# Altium PCB PDB_Layout_2oz_v1.8.PcbDoc
Units mm, origin at the board's own origin, x right, y up, seen from the top; angles counter-clockwise.
Board outline 50 x 36 mm, 4 copper layers (Top Layer, GND_L2, PWR_L3, Bottom Layer), stack 1.922 mm thick; 33 components, 10 nets, 74 pads, 109 vias.
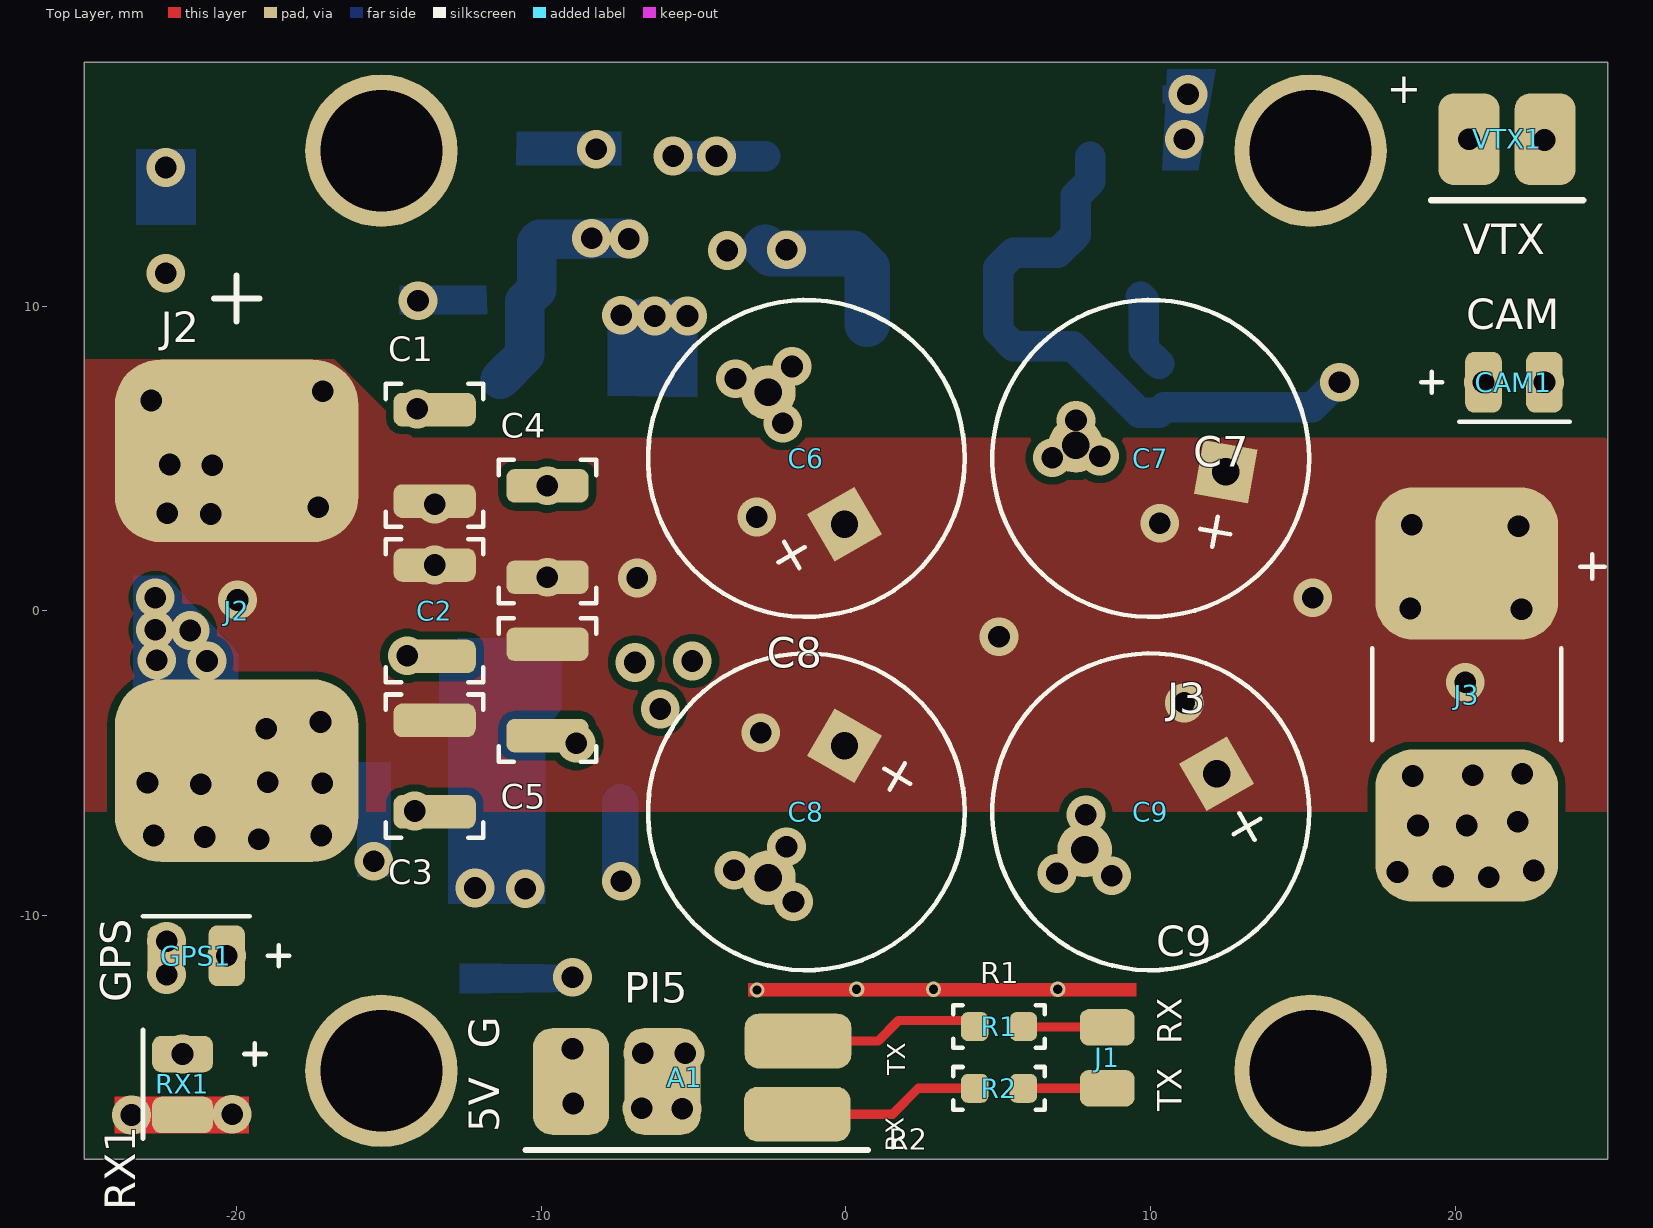
[diagram p0: Top Layer view]
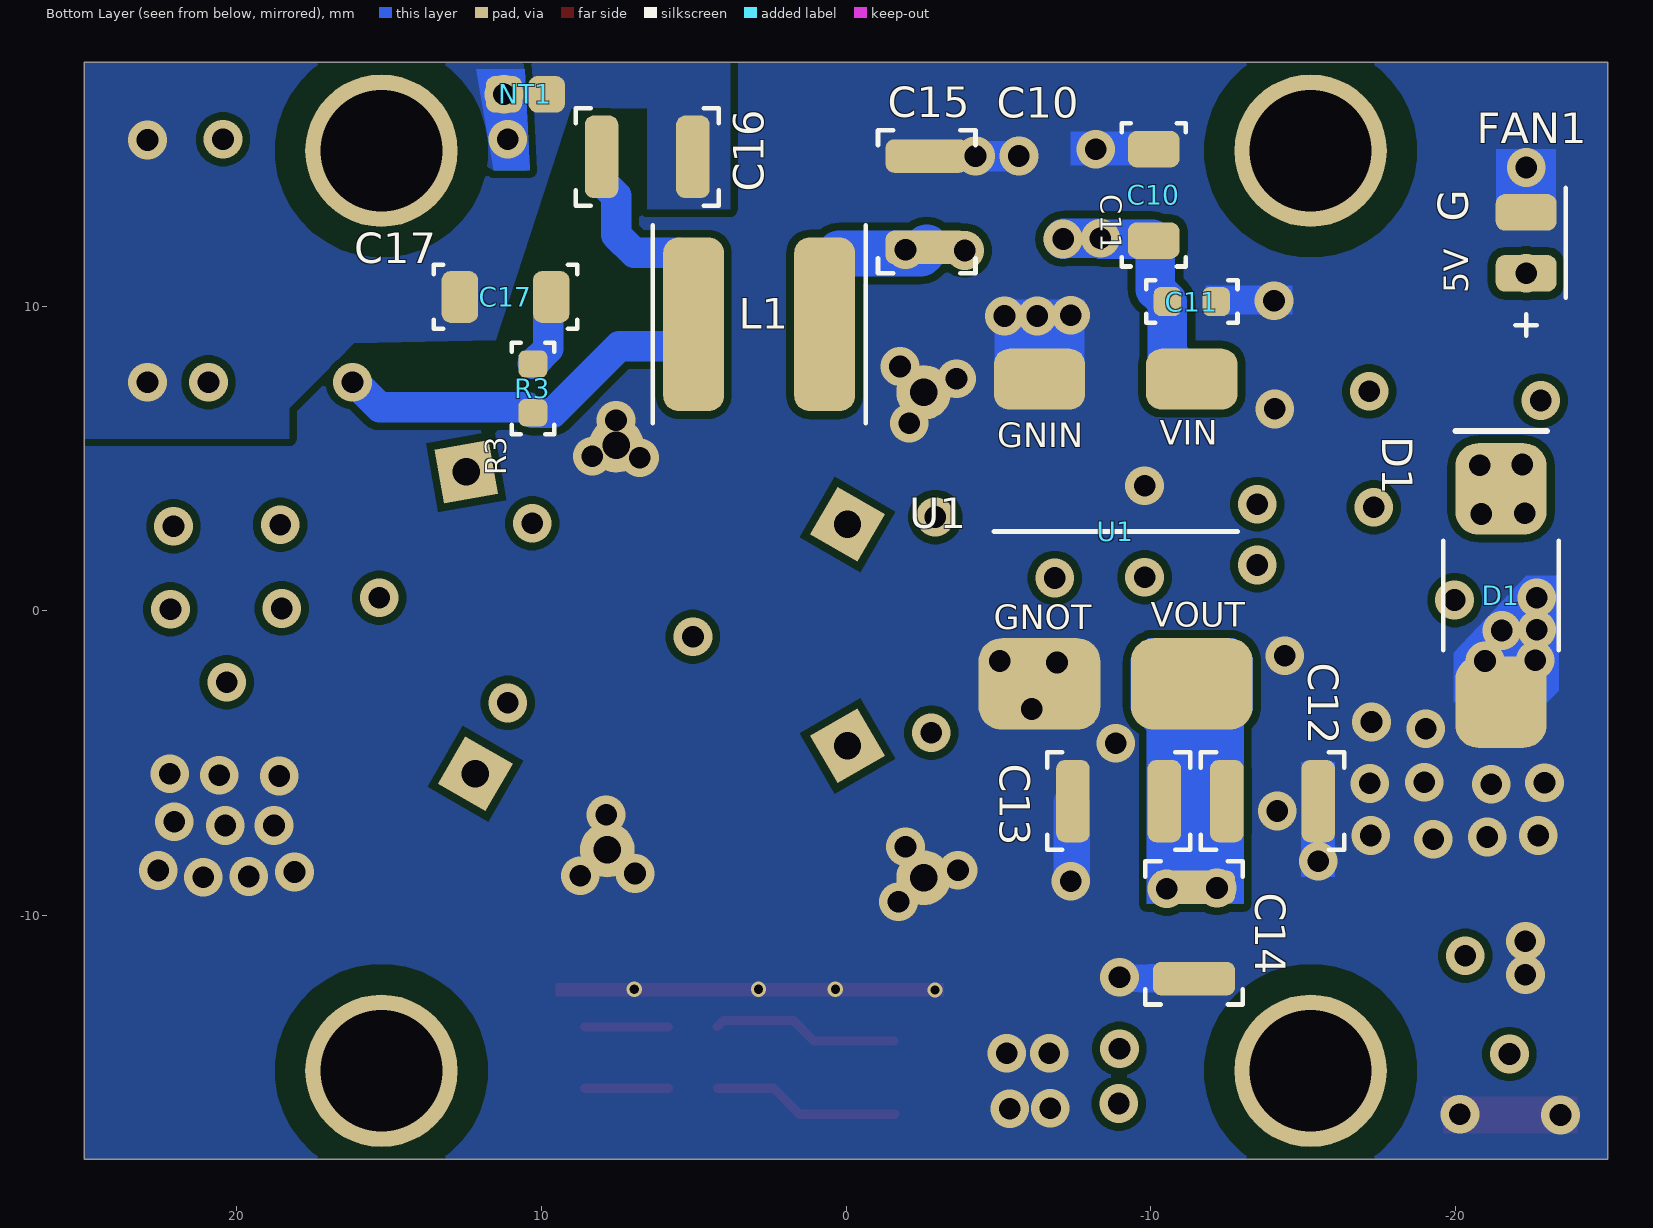
[diagram p1: Bottom Layer view, seen from below]
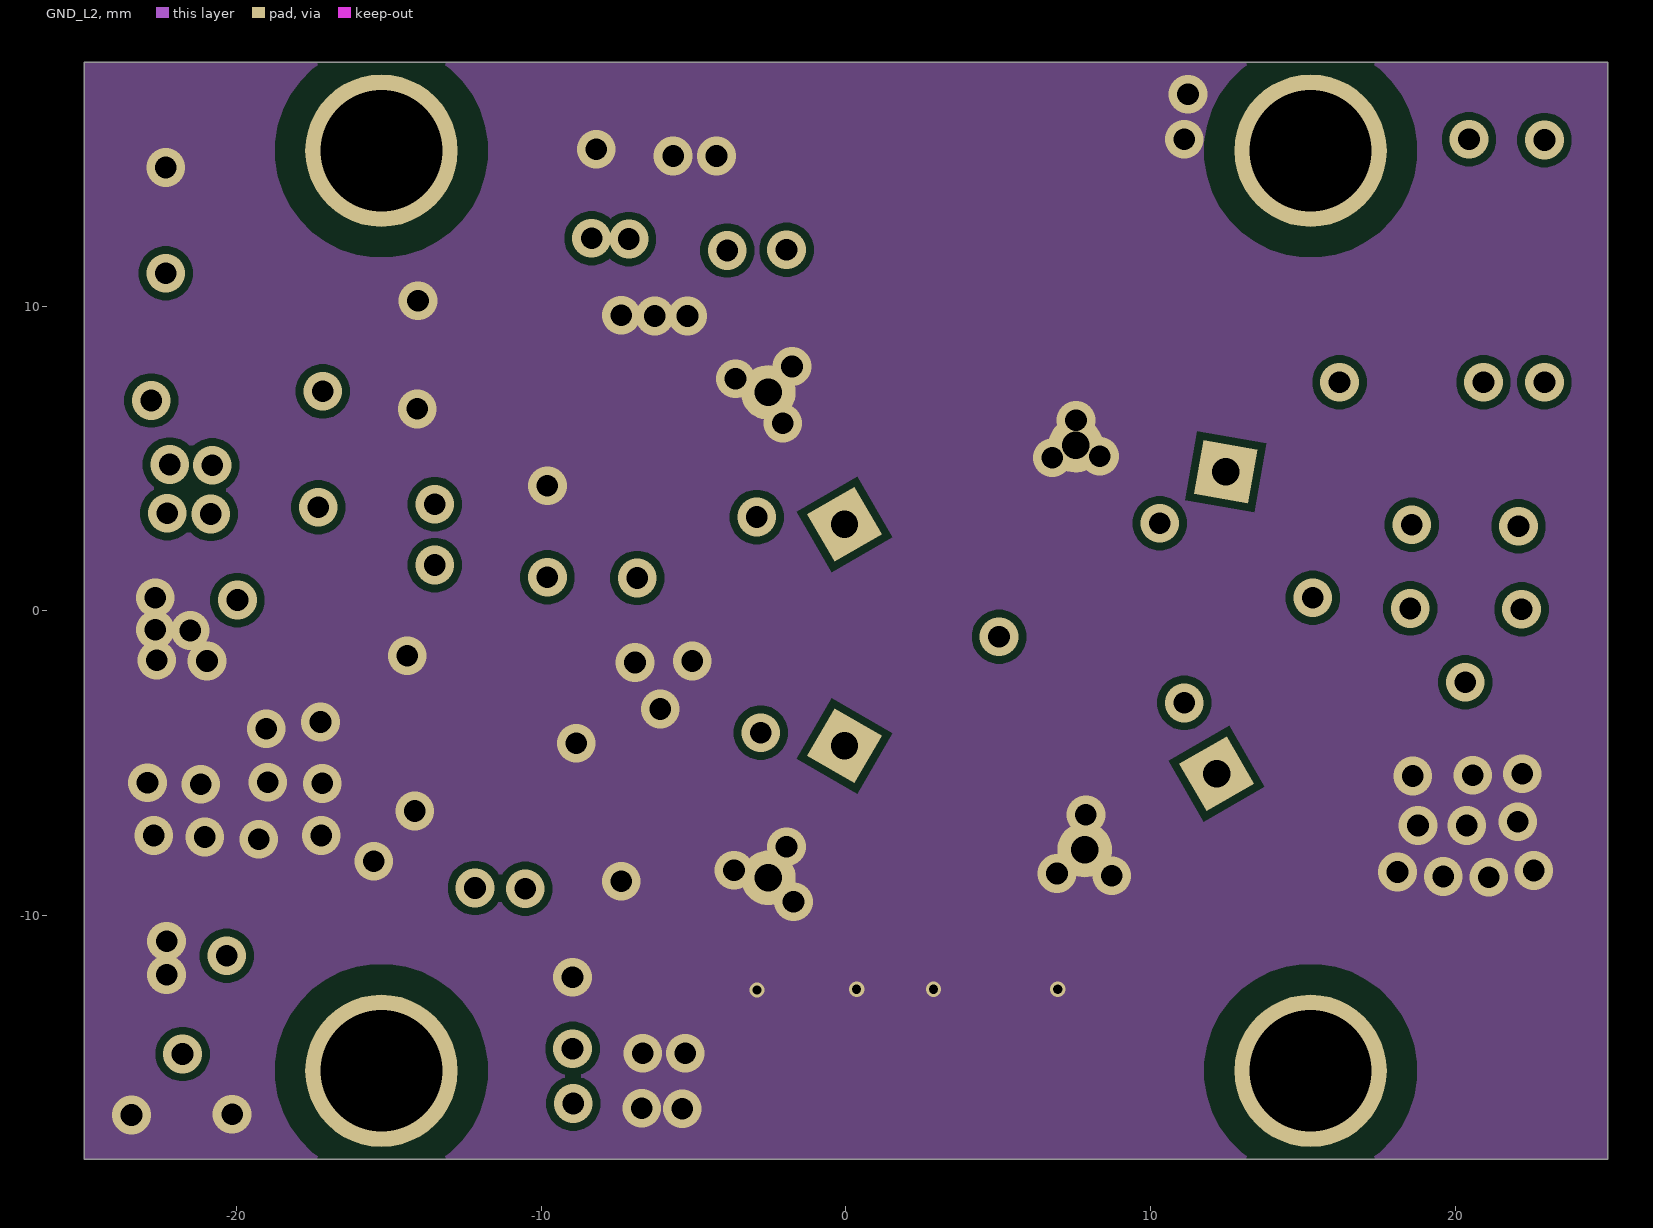
[diagram p2: GND_L2]
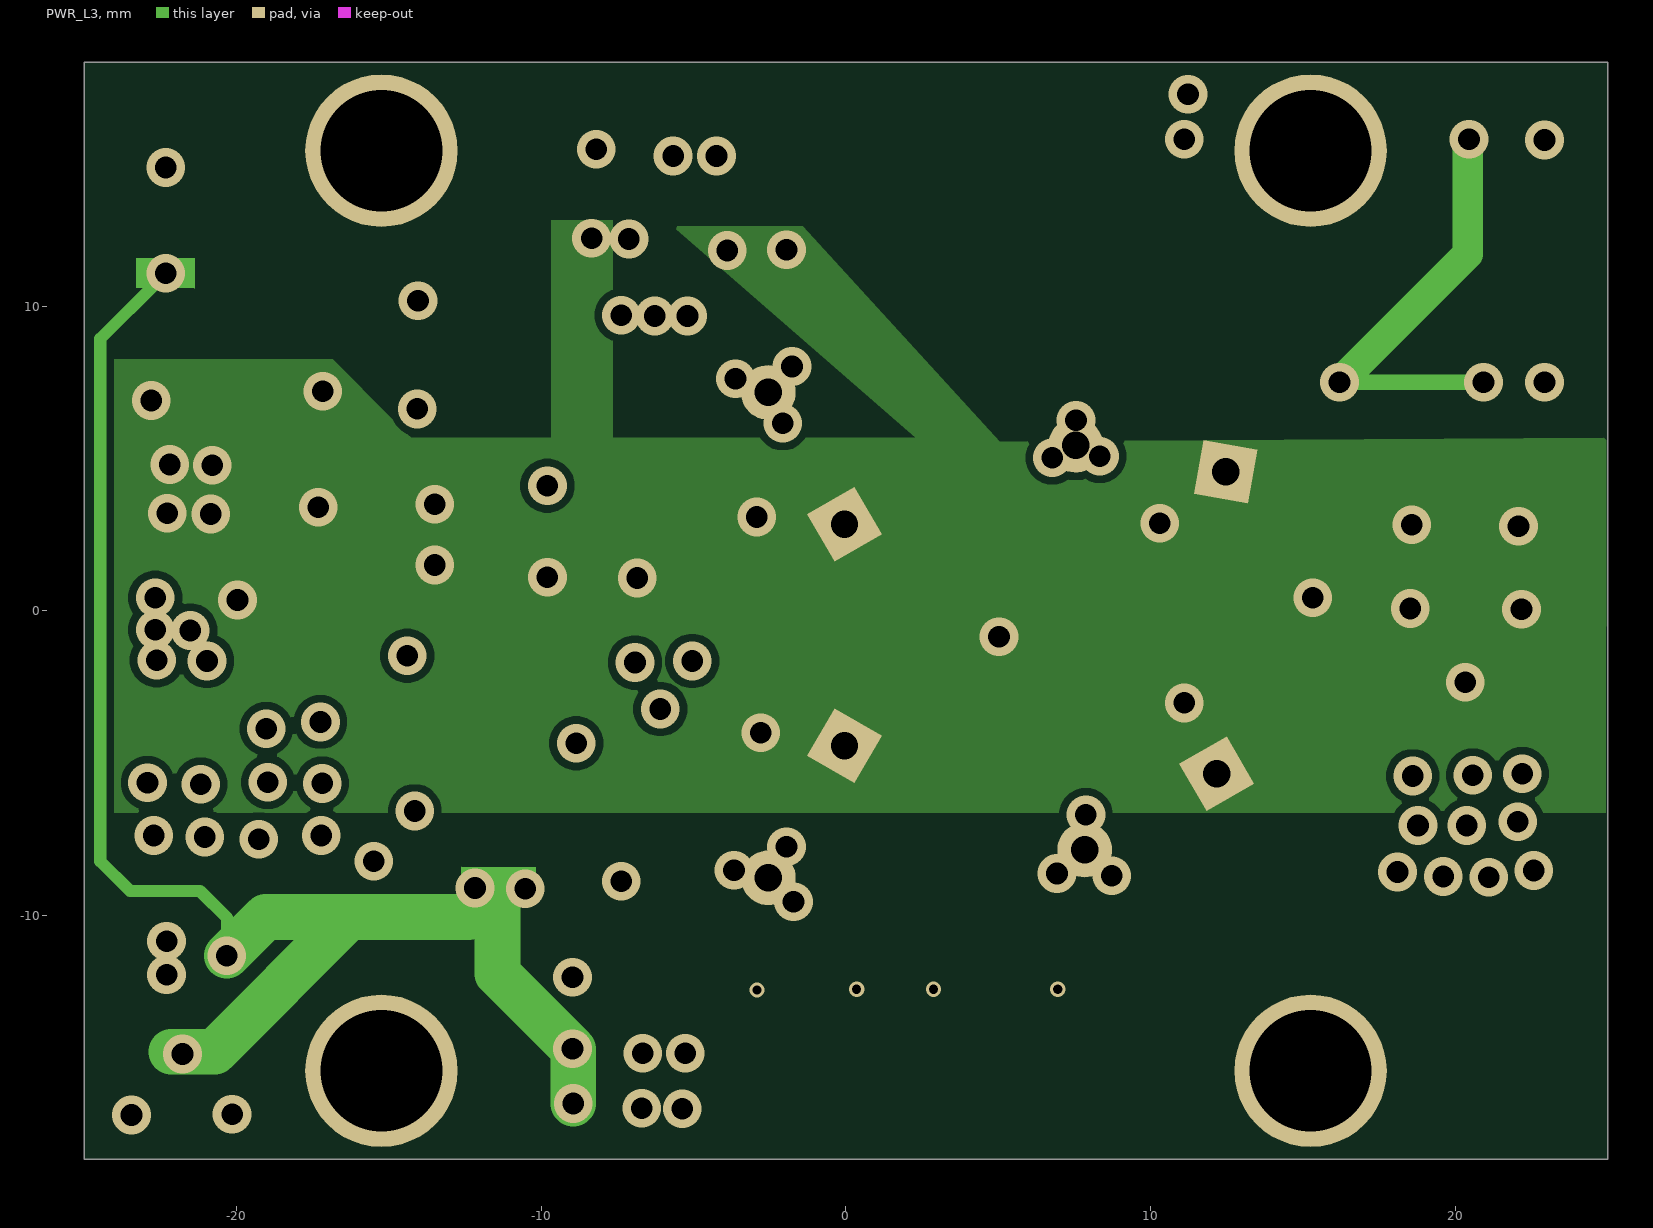
[diagram p3: PWR_L3]

## Layer stack, top to bottom
Top Solder: solder mask 0.0102, Solder Resist, Dk 3.5
Top Layer: signal copper 0.07
Dielectric 2: prepreg 0.0711, PP-006, Dk 4.1
GND_L2: signal copper 0.07
Dielectric 1: dielectric 1.5, FR-4, Dk 4.8
PWR_L3: signal copper 0.07
Dielectric 3: prepreg 0.0711, PP-006, Dk 4.1
Bottom Layer: signal copper 0.07
Bottom Solder: solder mask 0.0102, Solder Resist, Dk 3.5

## Board outline
-25,-18 -25,18 25,18 25,-18

## Design rules (kind name [scope] priority, off if disabled: settings)
Clearance Clearance_MountingHoles [IsPad AND IsFree] p1: gap=1 ignorepadtopadclearanceinfootprint=FALSE
Clearance [All] p2: gap=0.25 ignorepadtopadclearanceinfootprint=FALSE
ComponentClearance [All] p1: gap=0.2 collisioncheckmode=3 verticalgap=0.2 showdistances=FALSE
HoleSize [All] p1: absolutevalues=TRUE maxlimit=5 minlimit=0.025 maxpercent=80.000 minpercent=20.000
HoleToHoleClearance [All] p1 off: gap=0.254 allowstackedmicrovias=TRUE
MinimumSolderMaskSliver [All] p1 off: minsoldermaskwidth=0.1
PolygonConnect ESC_POWER [InComponent('J3')] p1: connectstyle=Direct reliefconductorwidth=0.7 reliefentries=4 polygonreliefangle="90 Angle" airgapwidth=0.254
PolygonConnect Connect_Direct_XT90 [InComponent('J2')] p2: connectstyle=Direct reliefconductorwidth=0.7 reliefentries=4 polygonreliefangle="90 Angle" airgapwidth=0.254
PolygonConnect Connect_Direct_VideoGND [InComponent('NT1')] p3: connectstyle=Direct reliefconductorwidth=0.7 reliefentries=4 polygonreliefangle="90 Angle" airgapwidth=0.254
PolygonConnect [All] p4: connectstyle=Direct reliefconductorwidth=0.7 reliefentries=4 polygonreliefangle="90 Angle" airgapwidth=0.254
RoutingVias [All] p1: holewidth=0.4 width=0.8 viastyle="Through Hole" minholewidth=0.4 minwidth=0.8 maxholewidth=0.4 maxwidth=0.8
SilkToSolderMaskClearance [IsPad] p1: minsilkscreentomaskgap=0.1 clearancetoexposedcopper=TRUE
SolderMaskExpansion [All] p1: expansion=0.102 istentingtop=FALSE
SupplyNets "Schematic Supply Nets" [InNet('GND')] p1: voltage=0.000
Width Width_5V [InNet('5V_Logic')] p1: maxlimit=1.5 minlimit=0.254 preferedwidth=1.5
Width [All] p2: maxlimit=1.5 minlimit=0.1 preferedwidth=0.5
25 further rules are at their usual default settings.

## Components (designator, comment, footprint, x,y, rotation, side; value= is the part's Value field where it differs from the comment)
A1 "Orange Pi 5 Pro" FOOTPRINT_ORANGE_PI -4.525,-15.45 r0 top
C1 "22uF 50V" 1210 -13.5,5.1 r270 top
C2 "22uF 50V" 1210 -13.5,0 r90 top
C3 "22uF 50V" 1210 -13.5,-5.1 r90 top
C4 "22uF 50V" 1210 -9.8,2.6 r270 top
C5 "22uF 50V" 1210 -9.8,-2.6 r90 top
C6 "390uF 35V" CAP_ELEC_D10.0_P5.0 -1.3,5 r120 top value=390uF
C7 "390uF 35V" CAP_ELEC_D10.0_P5.0 10,5 r170 top value=390uF
C8 "390uF 35V" CAP_ELEC_D10.0_P5.0 -1.3,-6.6 r240 top value=390uF
C9 "390uF 35V" CAP_ELEC_D10.0_P5.0 10,-6.6 r210 top value=390uF
C10 "10uF 50V" 1206 -10.1,13.65 r270 bottom
C11 "100nF 50V" 0603 -11.35,10.15 r0 bottom
C12 "47uF 16V" 1210 -14,-6.25 r0 bottom
C13 "47uF 16V" 1210 -8.95,-6.25 r180 bottom
C14 "22uF 50V" 1210 -11.425,-10.575 r90 bottom
C15 "22uF 50V" 1210 -2.65,13.425 r270 bottom
C16 "22uF 50V" 1210 6.525,14.9 r0 bottom
C17 "22uF 50V" 1206 11.175,10.3 r180 bottom
CAM1 "Caddx Ratel 2" FOOTPRINT_Caddx_Ratel_2 23.925,7.5 r0 top
D1 "SMCJ26A" DIODE_SMC -21.5,0.5 r270 bottom
FAN1 "Cooling_Fan" FOOTPRINT_FAN_5V -22.325,12.075 r90 bottom
GPS1 "Beitian M10" FOOTPRINT_BEITIAN_M10 -25.325,-11.325 r180 top
J1 "UART_SB_RECIEVER" UART_SPEEDYBEE_RECIEVER 8.575,-14.675 r270 top
J2 "XT90-S" XT90-S_PWR -20,0 r270 top
J3 "ESC_POWER" PADS_ESC_PWR 20.375,-2.75 r270 top
L1 "33uH / 1.5A" FOOTPRINT_INDUCTOR_SRN6045 2.85,9.4 r0 bottom value=33uH
NT1 "GND_Tie" NET_TIE_0.2MM 10.525,16.95 r180 bottom net-tie
R1 "47 Ohm 1% 0603" 0603 5.025,-13.65 r0 top
R2 "47 Ohm 1% 0603" 0603 5.025,-15.675 r0 top
R3 "3.3 Ohm" 0603 10.275,7.3 r270 bottom
RX1 "ELRS Receiver" FOOTPRINT_ELRS_RX -21.775,-17.55 r270 top
U1 "Hobbywing UBEC 5A" UBEC_Hobbywing_5A -8.85,2.6 r270 bottom
VTX1 "Rush Tank Solo" FOOTPRINT_VTX_RUSH_SOLO 24.2,15.475 r0 top

## Footprints (in the part's own frame and the unit in brackets; to place one, negate y for a bottom-side part, rotate by r counter-clockwise, add the part's x,y. Pads: shape width x height; smd on the part's side, far side on the other; paste and mask are expansions set on the pad)
0603 [mm] "CAPC1608X90N"
  rrect50% 0.9x0.95 smd: 1(-0.8,0) 2(0.8,0)
  silkscreen extent -1.5,-0.7 1.5,0.7
1206 [mm] "CAPC3216X180N"
  rrect50% 1.2x1.7 smd: 1(-1.5,0) 2(1.5,0)
  silkscreen extent -2.35,-1.05 2.35,1.05
1210 [mm] "CAPC3225X280N"
  rrect50% 1.1x2.7 smd: 1(-1.5,0) 2(1.5,0)
  silkscreen extent -2.35,-1.6 2.35,1.6
CAP_ELEC_D10.0_P5.0 [mm] "CAPRB500W60D1000H1600"
  rect 1.8x1.8 hole 0.9: 1(-2.5,0)
  round 1.8 hole 0.9: 2(2.5,0)
  silkscreen extent -5.2,-5.2 5.2,5.2
DIODE_SMC [mm]
  rrect50% 3x3 smd: 1(-3.5,0) 2(3.5,0)
  silkscreen extent -5.4,-1.9 1.8,1.9
FOOTPRINT_BEITIAN_M10 [mm]
  rrect50% 1.2x2 smd: 1(-5,0) 2(-3,0)
  silkscreen extent -7.05,-1.3 -2.25,0.35
FOOTPRINT_Caddx_Ratel_2 [mm]
  rrect50% 1.2x2 smd: 1(-3,0) 2(-1,0)
  silkscreen extent -5.05,-1.3 -0.18,0.35
FOOTPRINT_ELRS_RX [mm]
  rrect50% 1.2x2 smd: 1(-3,0) 2(-1,0)
  silkscreen extent -3.8,-1.3 -0.23,2.73
FOOTPRINT_FAN_5V [mm]
  rrect50% 1.2x2 smd: 1(-1,0) 2(1,0)
  silkscreen extent -3.05,-1.3 1.8,0.35
FOOTPRINT_INDUCTOR_SRN6045 [mm]
  rrect50% 2x5.7 smd: 1(-2.15,0) 2(2.15,0)
  silkscreen extent -3.5,-3.25 3.5,3.25
FOOTPRINT_ORANGE_PI [mm]
  rrect50% 2.5x3.5 smd: 1(-4.5,0) 2(-1.5,0)
  rrect50% 3.5x1.8 smd: 3(2.95,1.325) 4(2.925,-1.075)
  silkscreen extent -6,-2.25 5.25,-2.25
FOOTPRINT_VTX_RUSH_SOLO [mm]
  rrect50% 2x3 smd: 1(-3.75,0) 2(-1.25,0)
  silkscreen extent -5,-2 0,-2
NET_TIE_0.2MM [mm]
  rrect50% 1.2x1.2 smd mask+0.102: 1(-0.7,0) 2(0.7,0)
  Top Layer region: -0.125,0.275 0.125,0.275 0.125,-0.3 -0.125,-0.3
PADS_ESC_PWR [mm]
  rrect50% 5x6 smd: 1(-4.3,0) 2(4.3,0)
  silkscreen extent -4.6,-3.1 1.5,4.53
UART_SPEEDYBEE_RECIEVER [mm]
  rrect50% 1.2x1.8 smd: 1(-1,0) 2(1,0)
UBEC_Hobbywing_5A [mm]
  rrect50% 2x3 smd: 1(-5,2.5) 3(-5,-2.5)
  rrect50% 3x4 smd: 2(5,2.5) 4(5,-2.5)
  silkscreen extent 0,-4 0,4
XT90-S_PWR [mm]
  rrect50% 6x8 smd: 1(-5.25,0) 2(5.25,0)
  silkscreen extent -11,-0.75 -9.5,0.75

## Part data
C1 C2 C3 C5: library part Cap_MLCC, "Multilayer Ceramic Capacitor (MLCC), 22uF 50V, X7R, 1210 (3225 Metric), High-Frequency ESC Filter. GRM32ER71H226ME14L"
C4 C15 C16: library part Cap_Cer_22uF_50V, "Multilayer Ceramic Capacitor (MLCC), 22uF 50V, X7R, 1210 (3225 Metric), High-Frequency ESC Filter. GRM32ER71H226ME14L"
C6 C7 C8 C9: library part Cap_Low_ESR, "Low ESR Aluminum Electrolytic Capacitor, Panasonic FR Series, 390uF 35V, Radial, 5mm Lead Pitc", Manufacturer=Panasonic, Part Number=EEU-FR1V391L, Voltage=35V
C10: library part Cap_Cer_10uF_50V_1206, "Ceramic Capacitor, 10 uF, 50 V, X7R Dielectric, 1206 SMD, UBEC VIN Buffer"
C11: library part Cap_Cer_100nF_50V_0603, "High-Frequency Ceramic Capacitor, 100 nF, 50 V, X7R Dielectric, 0603 SMD, UBEC VIN Decoupling"
C12 C13: library part Cap_Cer_47uF_16V, "Capacitor MLCC 47uF 16V X7R 1210 / GRM32ER71C476KE15L"
C14: library part Cap_MLCC, "Multilayer Ceramic Capacitor (MLCC), 22uF 50V, X7R, 1210 (3225 Metric), High-Frequency ESC Filter"
C17: library part Cap_Cer_22uF_50V_1206, "Capacitor MLCC 22uF 50V ±20% X7R 1206 (3216 Metric)"
CAM1: "Analog FPV Micro Camera, 1200TVL, Ultra Low Light Starlight"
D1: "Transient Voltage Suppressor (TVS) Diode, Unidirectional, 26V Vrwm, 1500W Peak, DO-214AB (SMC)"
FAN1: library part "Cooling Fan 5V", "V DC Micro Cooling Fan, 25x25x10mm Active Cooling"
GPS1: "GNSS GPS + Compass Module, M10 Platform, UART & I2C Interface"
J1: library part UART_SPEEDYBEE_RECIEVER
J2: "High-Current DC Power Connector with Integrated Anti-Spark Resistance, Amass XT90-S, 90A Peak"
J3: library part PADS_WIRE_1X2, "Wire-to-Board Solder Pads Array, 1x2, 2.54mm Pitch"
L1: library part Inductor_SMD, "Semi-Shielded Power Inductor, Bourns SRN6045 Series, 33uH 2.5A, 0.15 Ohm DCR, LC Video Filter", Current=2.5A, Manufacturer=Bourns, Manufacturer Part Number=SRN6045-330M, Package="6045 SMD", DCR="0.15 Ohm"
NT1: library part NET_TIE, "Net-Tie zero-ohm bridge for ground separation"
R1 R2: library part Res_SMD, "Thick Film Chip Resistor, Yageo RC Series, 47 Ohm 1%, 0.1W (100mW), 0603 (1608 Metric), UART Protection", Manufacturer=Yageo, Part Number=RC0603FR-0747RL
R3: library part Res_3.3Ohm_0603, "Resistor SMD 3.3 Ohm 1% 1/10W (0.1W) 0603 Thick Film"
RX1: library part "ExpressLRS RX", "ExpressLRS 2.4GHz True Diversity Radio Receiver Module"
U1: library part UBEC_Hobbywing_5A, "External Step-Down Switching Voltage Regulator Module, Hobbywing UBEC 5A, 2-6S LiPo Input, 5V/6V Selectable Output", Continuous Current=5A, Input Voltage="2-8S LiPo (5.5V - 33.6V)", Manufacturer=Hobbywing, Output Voltage="5.0V / 6.0V / 7.4V", Part Number=HW30607000, Peak Current=15A, Type="Step-Down (Buck) DC-DC"
VTX1: library part "Rush Tank Solo 1.6W", "5.8GHz VTX 1.6W Video Transmitter Module"

## Free pads (board coordinates)
  round 5 hole 4: 1(-15.25,15.1) 2(15.25,15.1) 3(-15.25,-15.1) 4(15.25,-15.1)

## Via types
v1: diameter 1.27, hole 0.711, Top Layer to Bottom Layer, tented bottom, 48 vias
v2: diameter 1.27, hole 0.711, Top Layer to Bottom Layer, tented both sides, 27 vias
v3: diameter 1.27, hole 0.711, Top Layer to Bottom Layer, 24 vias
v4: diameter 1.27, hole 0.711, Top Layer to Bottom Layer, tented top, 6 vias
v5: diameter 0.5, hole 0.3, Top Layer to Bottom Layer, tented both sides, 4 vias

## Nets (pads, with @x,y where several pads share a name; then routed paths per layer and width w, separated by ;. In a path a pad name is that pad's centre, name@x,y a point inside that pad or via, vN(x,y) a via of type N, cw(c..) or ccw(c..) an arc to the next point about the centre after c; other vN are vias at no path point)
5V_Logic: A1.1 C12.2 C13.2 C14.2 FAN1.1 GPS1.1 RX1.1 U1.2 | length 50.9
  PWR_L3 w0.4: v4@-22.575,10.825 -24.475,8.925 -24.475,-8.221 -23.496,-9.2 -21.2,-9.2 -20.321,-10.079 v1@-20.321,-11.321
  PWR_L3 w1.5: v1@-22.15,-14.475 -20.725,-14.475 -16.3,-10.05 ; v1@-20.321,-11.321 v1(-20.325,-11.325) -19.05,-10.05 -16.3,-10.05 ; v1(-8.95,-16.175) -8.95,-14.4 -11.438,-11.913 -11.438,-9.837 -11.812,-9.463 -12.4,-10.05 -16.3,-10.05
  other v1: -21.775,-14.55 -8.975,-14.375
  other v3: -10.525,-9.125 -12.175,-9.1
  other v4: -22.325,11.075
GND: A1.2 C1.1 C2.1 C3.1 C4.1 C5.1 C6.2 C7.2 C8.2 C9.2 C10.1 C11.1 C12.1 C13.1 C14.1 C15.1 D1.2 FAN1.2 GPS1.2 J2.2 J3.2 NT1.1 RX1.2 U1.3 U1.4 | length 7.3
  Bottom Layer w0.3: C13.1 C13.1@-7.412,-6.288 ; v2@-7.412,-8.837 v2(-7.375,-8.875)
  Bottom Layer w1: v2(-5.675,14.925) C15.1 v4(-4.25,14.925)
  Bottom Layer w1.2: v2@-7.412,-8.837 C13.1@-7.412,-6.288
  other v1: -5.375,-16.35 -6.7,-16.325 -6.675,-14.525 -5.275,-14.525 -22.3,-11.95 -22.3,-10.85 21.1,-8.75 19.6,-8.725 18.1,-8.575 22.575,-8.525 -19.275,-7.5 -21.05,-7.425 -22.725,-7.375 -17.225,-7.375 18.775,-7.05 20.375,-7.05 22.05,-6.925 -21.175,-5.7 -22.925,-5.65 -17.187,-5.667 -18.975,-5.625 18.6,-5.425 20.575,-5.4 22.2,-5.35 -8.85,-4.35 -19.025,-3.875 -17.25,-3.65 -14.4,-1.475 -9.8,4.1 -14.075,6.625
  other v2: -23.45,-16.55 -20.15,-16.525 -8.975,-12.025 -15.5,-8.225 -21.525,-0.65 -22.675,-0.625 -22.675,0.425 -6.275,9.675 -5.2,9.675 -7.375,9.7 -14.05,10.175 -22.325,14.55 -8.2,15.15 11.1,15.475 11.225,16.95
  other v3: -1.725,-9.55 8.725,-8.7 6.925,-8.625 -3.678,-8.518 -1.95,-7.75 7.875,-6.7 -14.15,-6.575 -6.1,-3.225 -6.925,-1.7 -5.05,-1.65 6.775,5.025 8.325,5.075 -2.075,6.15 7.55,6.25 -3.625,7.61 -1.772,8.019
  other v4: -20.975,-1.65 -22.625,-1.625
  other v5: -2.925,-12.45 0.35,-12.425 2.875,-12.425 6.95,-12.425
NetA1_3: A1.3 R1.1 | length 6.2
  Top Layer w0.3: A1.3 1.05,-14.125 1.725,-13.45 4.025,-13.45 R1.1
NetA1_4: A1.4 R2.1 | length 6.2
  Top Layer w0.3: A1.4 1.525,-16.525 2.375,-15.675 R2.1@4.209,-15.675
NetC16_2: C16.2 CAM1.1 L1.2 R3.2 VTX1.1 | length 35
  PWR_L3 w0.5: v3(16.2,7.5) v1(20.925,7.5)
  PWR_L3 w1: v3(16.2,7.5) 20.403,11.703 20.403,15.428 v1(20.45,15.475)
  Bottom Layer w1: C16.2 8.025,14.1 7.54,13.615 7.54,12.336 6.954,11.75 5.5,11.75 5,11.25 5,9.186 5.5,8.686 7.439,8.686 9.625,6.5 R3.2 10.45,6.675 15.302,6.675 16.127,7.5 v3(16.2,7.5)
NetC17_2: C17.2 R3.1 | length 2.4
  Bottom Layer w1: C17.2 9.775,10.2 9.775,8.6 R3.1
NetJ1_1: J1.1 R1.2 | length 2.7
  Top Layer w0.3: R1.2@5.825,-13.662 J1.1@8.575,-13.662
NetJ1_2: J1.2 R2.2 | length 2.7
  Top Layer w0.3: R2.2 J1.2
VBAT: C1.2 C2.2 C3.2 C4.2 C5.2 C6.1 C7.1 C8.1 C9.1 C10.2 C11.2 C15.2 D1.1 J2.1 J3.1 L1.1 U1.1 | length 13.5
  Bottom Layer w1.3: U1.1 -10.55,8.4 C11.2@-10.55,10.125 ; C11.2 -10.155,10.545 -10.155,12.1 -10.15,12.1 -10.05,12.2 -8.375,12.2 v2(-8.35,12.225) -7.15,12.225 v2(-7.125,12.2)
  Bottom Layer w1.5: C15.2 -2.45,11.725 0.225,11.725 0.7,11.25 L1.1
  other v1: 22.175,0.05 18.525,0.075 -9.8,1.1 -13.5,1.5 22.075,2.775 18.575,2.825 -17.325,3.4 -13.5,3.5 -22.8,6.9 -17.175,7.2
  other v2: -2.8,-4 11.1,-3.025 20.325,-2.35 5.025,-0.85 -19.975,0.35 15.325,0.425 -6.85,1.075 10.3,2.875
  other v3: -2.925,3.075 -20.85,3.175 -22.275,3.2 -20.8,4.775 -22.2,4.8
  other v4: -3.9,11.825 -1.95,11.85
Video_GND: C16.1 C17.1 CAM1.2 NT1.2 VTX1.2 | length 0
  Top Layer w0.254: v1(22.925,15.45) VTX1.2
  other v1: 22.925,7.5

## Polygon pours and split planes (outlines as drawn)
Video_GND on Bottom Layer "VIDEO_GND_L04_P010" (solid, remove dead copper, pour order 10): 6.525,16.5 6.525,13.175 3.8,13.175 3.8,18 25.001,18 25.001,5.651 25,5.65 18.275,5.65 18.275,6.65 16.15,8.775 11.5,8.875 9.026,16.5
GND on Bottom Layer "GND_L04_P011" (solid, remove dead copper, pour order 11): 25.001,18.001 -25,18.001 -25,-18 25.001,-18
GND on GND_L2 "GND_L02_P000" (solid, pour order 0): -25,18 25,18 25,-18 -25,-18
VBAT on Top Layer "VBAT_L01_P004" (solid, pour order 4): -16.8,8.25 -25,8.25 -25,-6.6 24.988,-6.6 25,5.675 -14.225,5.675
VBAT on PWR_L3 "VBAT_L03_P009" (solid, pour order 9): -7.65,5.675 -7.65,12.825 -9.675,12.825 -9.675,5.675 -14.275,5.675 -16.85,8.25 -25,8.25 -25,-6.637 24.938,-6.637 24.95,5.675 5.05,5.55 -1.425,12.62 -5.678,12.62 2.287,5.675

## Other copper
Top Layer:
  region net GND: 9.525,-12.375 9.525,-12.225 -3.2,-12.225 -3.2,-12.425 -3.2,-12.65 9.525,-12.65
  region net GND: -24,-15.95 -19.6,-15.95 -19.6,-17.15 -24,-17.15
PWR_L3:
  region net 5V_Logic: -12.625,-8.4 -12.6,-8.425 -10.175,-8.425 -10.175,-9.5 -10.25,-9.5 -12.625,-9.5
  region net 5V_Logic: -23.3,11.575 -21.375,11.575 -21.375,10.575 -21.4,10.6 -23.3,10.6
Bottom Layer:
  region net GND: -12.675,-11.575 -8.525,-11.625 -8.575,-12.5 -12.675,-12.575
  region net GND: -16.05,-4.975 -16.05,-8.725 -14.95,-8.725 -14.95,-4.975
  region net GND: -21.35,12.675 -21.35,15.15 -23.3,15.15 -23.3,15 -23.3,12.675
  region net GND: -11.802,10.675 -14.65,10.675 -14.65,9.725 -11.8,9.725 -11.775,9.75
  region net GND: -10.8,15.7 -10.775,15.725 -7.375,15.725 -7.375,14.625 -10.825,14.625
  region net GND: -7.825,7.05 -7.825,10.2 -4.875,10.2 -4.875,10.15 -4.875,7
  region net GND: -22.325,1.15 -19.95,-1.375 -19.95,-3 -22.975,-3 -23,-3.025 -23.4,-2.625 -23.4,1.15
  region net GND: 10.55,17.775 12.145,17.775 11.567,14.453 10.387,14.453
  region net 5V_Logic: -13.35,-3.25 -13.35,-1.55 -12.75,-0.9 -9.925,-0.9 -9.35,-1.575 -9.35,-3.22 -9.875,-3.945 -9.875,-9.625 -13.05,-9.625 -13.05,-3.725 -13.2,-3.6

## Silkscreen, mask and mechanical layers (free items; w line width, h text height)
Bottom Courtyard:
  the board outline again, w0.15

## Text inside footprints (layer, text, board x,y; h text height)
A1: Top Overlay "PI5" at -7.275,-12.866 h1; Top Overlay "G" at -11.375,-14.375 h1 r90; Top Overlay "TX" at 1.95,-15.25 h0.6 r90; Top Overlay "RX" at 1.9,-17.75 h0.6 r90; Top Overlay "5V" at -11.375,-17.125 h1 r90
CAM1: Top Overlay "CAM" at 20.367,9.242 h1
FAN1: Bottom Overlay "G" at -20.425,12.775 h1 r270; Bottom Overlay "5V" at -20.425,10.425 h0.8 r270
GPS1: Top Overlay "GPS" at -23.475,-12.858 h1 r90
J1: Top Overlay "TX" at 11.025,-16.425 h0.8 r90; Top Overlay "RX" at 11.025,-14.225 h0.8 r90
U1: Bottom Overlay "GNOT" at -4.845,-0.605 h0.8; Bottom Overlay "GNIN" at -4.97,5.37 h0.8; Bottom Overlay "VOUT" at -9.995,-0.53 h0.8; Bottom Overlay "VIN" at -10.295,5.445 h0.8
VTX1: Top Overlay "VTX" at 20.242,11.704 h1; Top Overlay "+" at 17.75,16.658 h1